# EAGLE board megamini-R32 (EAGLE 6.2)
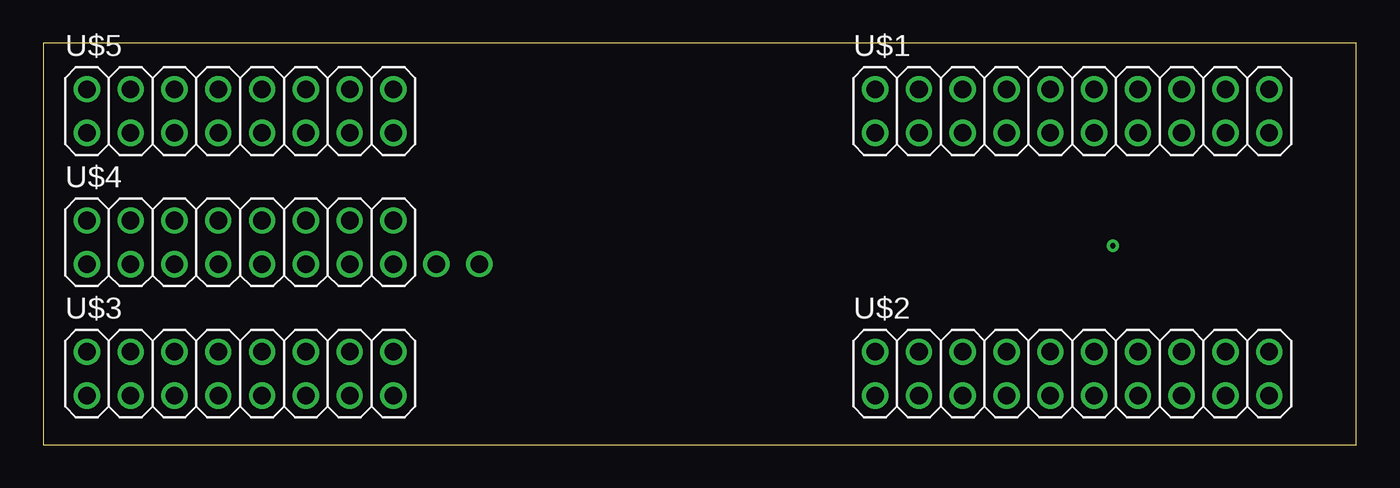
[diagram p0: board, top side]

Size 76.17 x 23.32 mm. Coordinates in mm from the lower left corner, seen from the top.
Outline: 0,0 76.17,0 76.17,23.32 0,23.32 0,0
Copper layers (1*16): Top 0.0356mm / dielectric 1.5011mm / Bottom 0.0356mm
Design rules: minimum track width 7mil, minimum drill 12mil, track to track 7mil, track to pad 7mil, pad to pad 7mil, via to via 7mil, smd to smd 0mil, copper to edge 10mil, drill to drill 8mil, minimum pad ring 10mil, minimum via ring 8mil, stop-mask expansion 4mil, vias tented up to drill 14mil, thermal gap 10mil

## Footprints (pad centres in the part's own frame; a part is rotated, then mirrored left to right if it is on the bottom)
1X01NS = drill 1.016 pad 1.524: 1 0,0
2X10 = drill 1.016 pad 1.524: 1 -11.43,-1.27; 2 -11.43,1.27; 3 -8.89,-1.27; 4 -8.89,1.27; 5 -6.35,-1.27; 6 -6.35,1.27; 7 -3.81,-1.27; 8 -3.81,1.27; 9 -1.27,-1.27; 10 -1.27,1.27; 11 1.27,-1.27; 12 1.27,1.27; 13 3.81,-1.27; 14 3.81,1.27; 15 6.35,-1.27; 16 6.35,1.27; 17 8.89,-1.27; 18 8.89,1.27; 19 11.43,-1.27; 20 11.43,1.27
2X8_SMALL = drill 1.016 pad 1.524: 1 0,0; 2 0,2.54; 3 2.54,0; 4 2.54,2.54; 5 5.08,0; 6 5.08,2.54; 7 7.62,0; 8 7.62,2.54; 9 10.16,0; 10 10.16,2.54; 11 12.7,0; 12 12.7,2.54; 13 15.24,0; 14 15.24,2.54; 15 17.78,0; 16 17.78,2.54

## Placement (x,y rotation side)
JP3  M01SMDNS  [1X01NS]  22.81,10.49 0 top
JP6  M01SMDNS  [1X01NS]  25.3,10.49 0 top
U$1  M10X2  [2X10]  59.69,19.37 0 top
U$2  M10X2  [2X10]  59.69,4.13 0 top
U$3  M08X2  [2X8_SMALL]  2.54,2.86 0 top
U$4  M08X2  [2X8_SMALL]  2.54,10.48 0 top
U$5  M08X2  [2X8_SMALL]  2.54,18.1 0 top

## Library data of the parts
JP3 JP6 U$1-U$5 = SparkFun

## Nets
GND: U$2.2

## Tracks (layer width: path | path; a pad name or v marks a point on that pad's centre or on a via)
GND  (via drill 0.3)
  other vias: 62.05,11.56

## Text on the board
JKD_ARDUINO: 15 | 14 | 13 | 12 | 11 | 10 | 9 | 8 | TXD3 | J2 | J3 | J4 | Analog | 7 | 6 | 5 | 4 | 3 | 2 | 1 | 0 | 22 | 23 | 24 | 25 | 26 | 27 | 28 | 29 | GND | AREF | E7 | TXD1 | H7 | SDA | RXD1 | 13 | 12 | 11 | 10 | 50 | 51 | 52 | 53 | 47 | 46 | 45